# Altium PCB Boost Converter.PcbDoc
Units mil, origin at the board's own origin, x right, y up, seen from the top; angles counter-clockwise.
Board outline 3149.61 x 3625 mil, 2 copper layers (Top Layer, Bottom Layer); 28 components, 20 nets, 64 pads, 15 vias.
Unrouted connection lines stored in the file: 2.
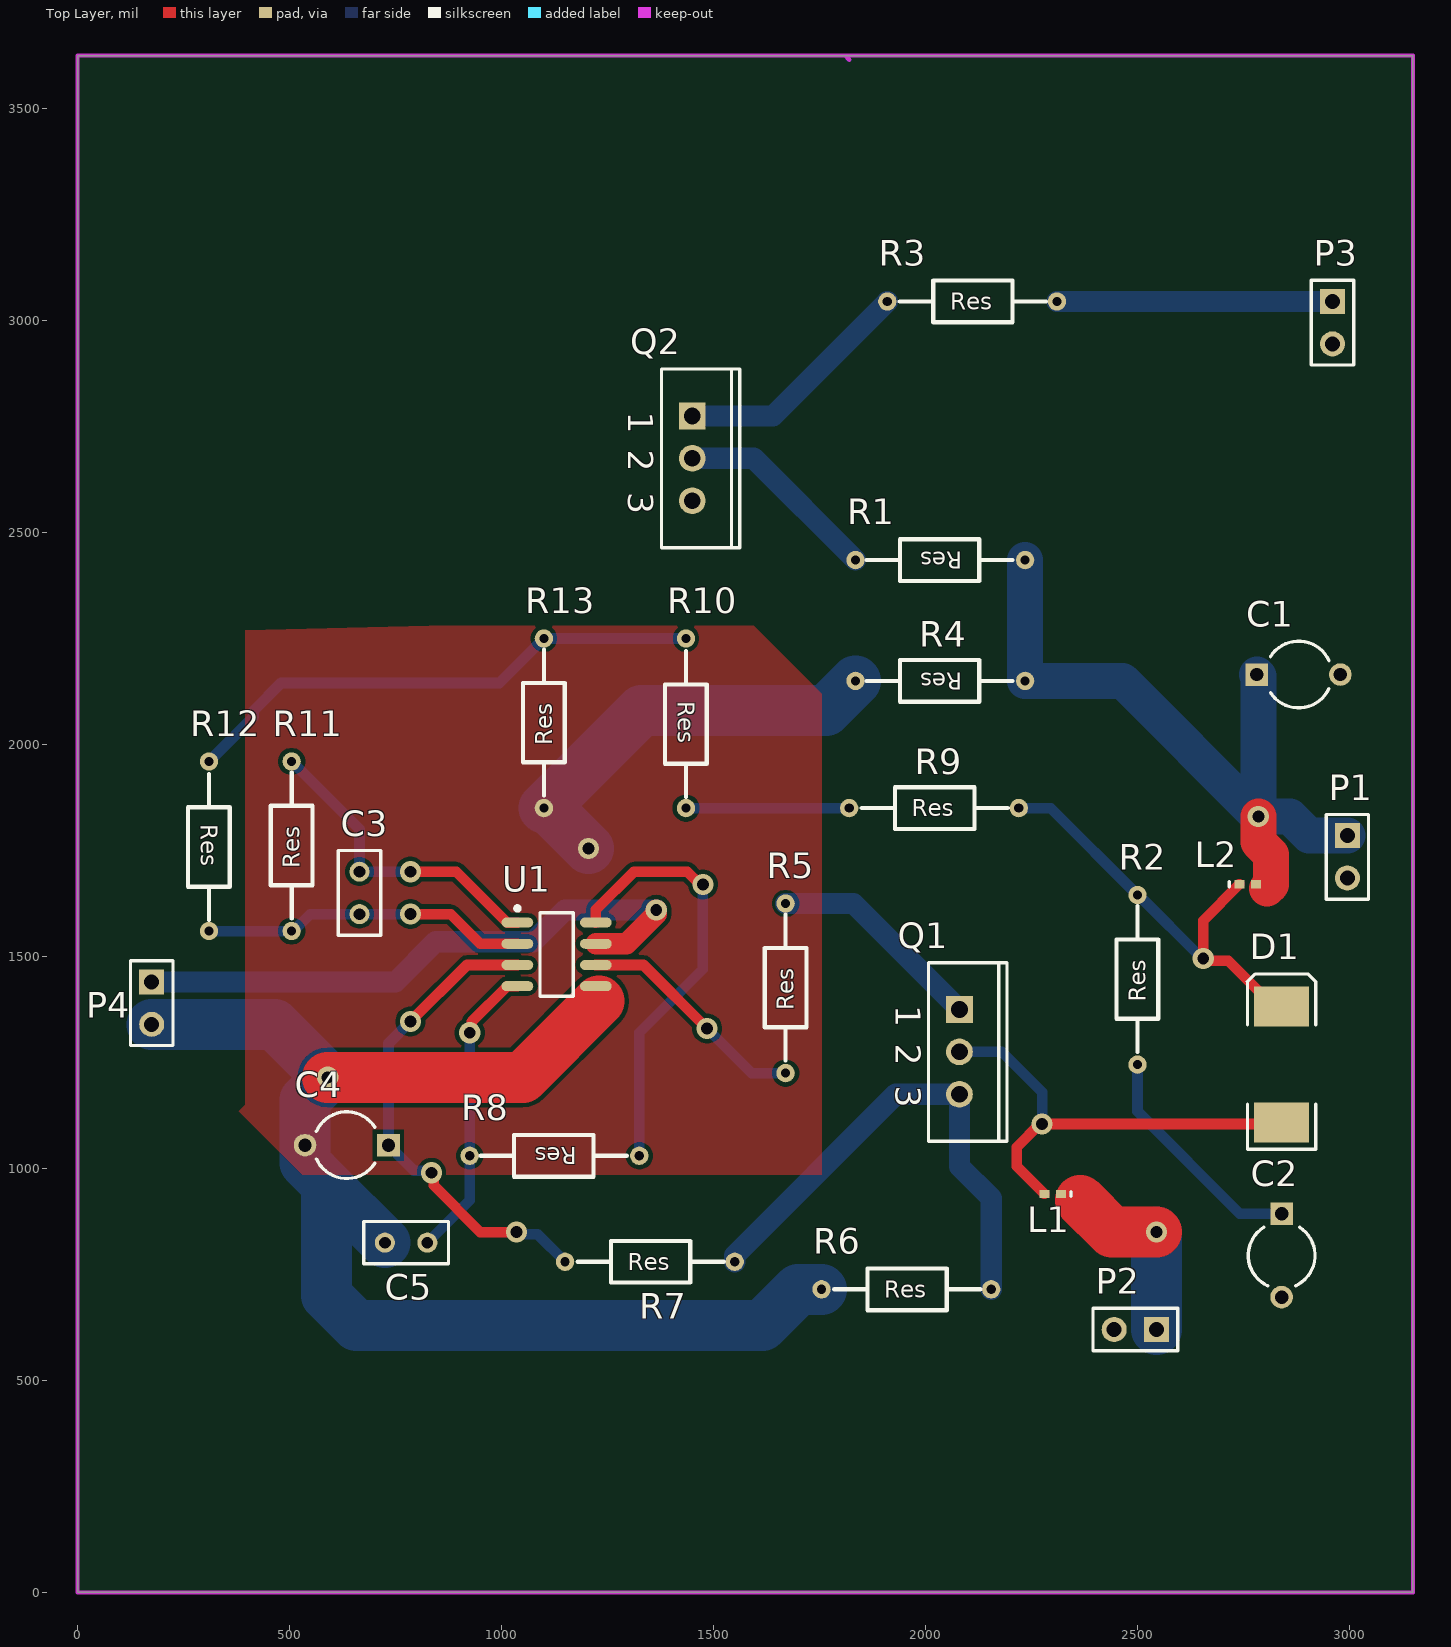
[diagram p0: Top Layer view]
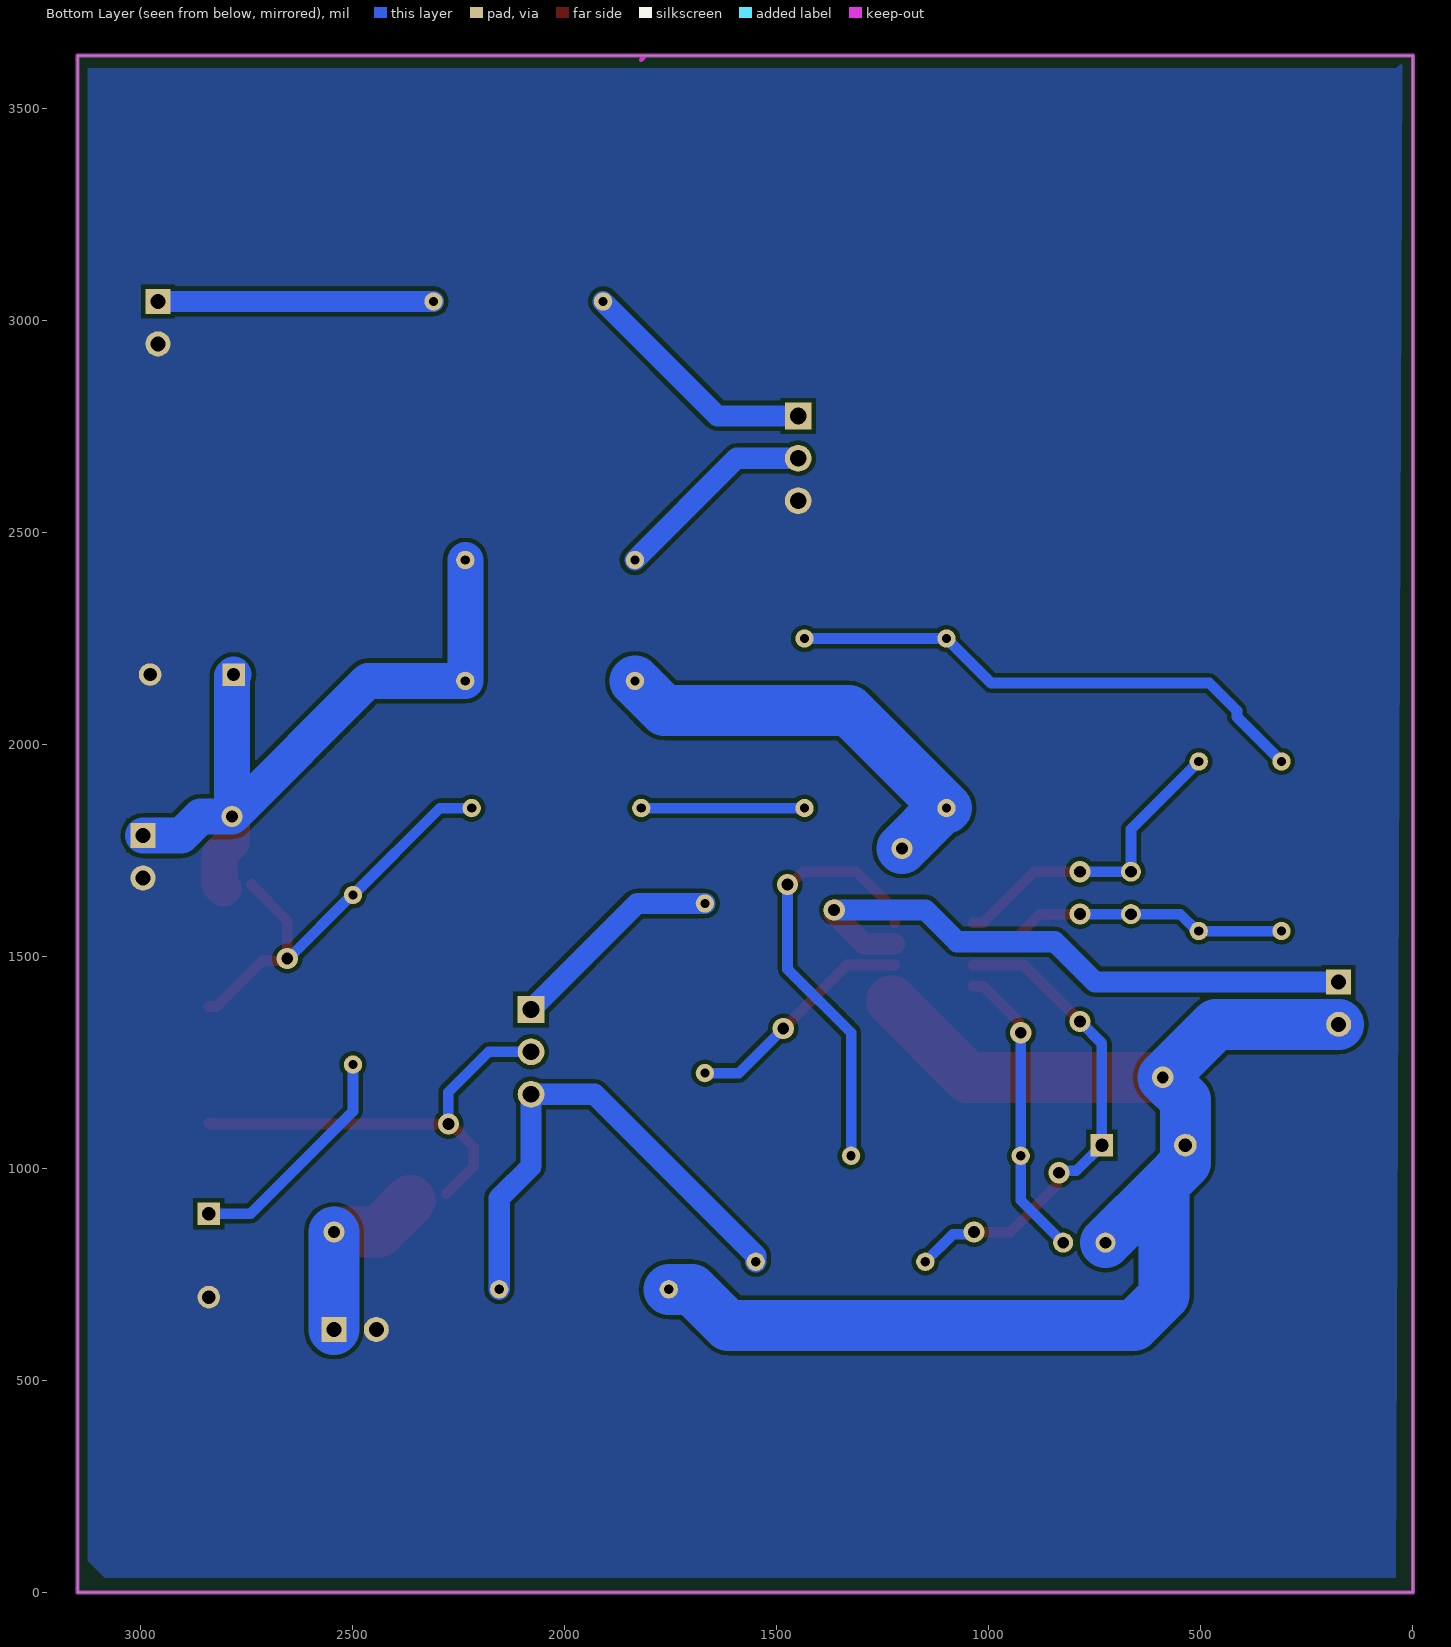
[diagram p1: Bottom Layer view, seen from below]

## Layer stack, top to bottom
Top Solder: solder mask 0.4, Solder Resist, Dk 3.5
Top Layer: signal copper 0.689
Dielectric 1: dielectric 12.6, FR-4, Dk 4.8
Bottom Layer: signal copper 0.689
Bottom Solder: solder mask 0.4, Solder Resist, Dk 3.5

## Board outline
0,0 0,3625 3149.61,3625 3149.61,0

## Design rules (kind name [scope] priority, off if disabled: settings)
Clearance [All] p1: gap=10 ignorepadtopadclearanceinfootprint=FALSE
ComponentClearance [All] p1: gap=16 collisioncheckmode=3 verticalgap=0 showdistances=FALSE
ComponentOrientations [All] p1: allowedrotations=32
HoleSize [All] p1: absolutevalues=TRUE maxlimit=100 minlimit=16 maxpercent=80.000 minpercent=20.000
HoleToHoleClearance [All] p1: gap=16 allowstackedmicrovias=TRUE
Length LVOUT [InNet('V_OUT')] p1: maxlimit=3000 minlimit=0
Length LVIN3 [InNet('VIN3')] p2: maxlimit=2000 minlimit=0
Length LVIN2 [InNet('VIN2')] p3: maxlimit=2000 minlimit=0
Length LVIN1 [InNet('VIN1')] p4: maxlimit=2000 minlimit=0
Length LGND [InNet('GND')] p5: maxlimit=8000 minlimit=0
Length LALL [All] p6: maxlimit=3000 minlimit=0
MinimumAnnularRing [All] p1: minimumring=10
ParallelSegment [All] p1: limit=10000 gap=10
PolygonConnect [All] p1: connectstyle=Direct reliefconductorwidth=10 reliefentries=4 polygonreliefangle="90 Angle" airgapwidth=10
RoutingVias [All] p1: holewidth=40 width=50 viastyle="Through Hole" minholewidth=16 minwidth=32 maxholewidth=125 maxwidth=250
SilkToSilkClearance [All] p1: silktosilkclearance=0
SilkToSolderMaskClearance [IsPad] p1: minsilkscreentomaskgap=0 clearancetoexposedcopper=TRUE
SolderMaskExpansion [All] p1: expansion=8 istentingtop=FALSE
Width WQ2_2 [InNet('NetQ2_2')] p1: maxlimit=1000 minlimit=24.25 preferedwidth=50
Width WQ2_1 [InNet('NetQ2_1')] p2: maxlimit=1000 minlimit=24.25 preferedwidth=50
Width WQ1_2 [InNet('NetQ1_3')] p3: maxlimit=1000 minlimit=24.25 preferedwidth=50
Width WQ1_1 [InNet('NetQ1_1')] p4: maxlimit=1000 minlimit=24.25 preferedwidth=50
Width WVOUT [InNet('V_OUT')] p5: maxlimit=1000 minlimit=63.09 preferedwidth=85
Width WVIN3 [InNet('VIN3')] p6: maxlimit=1000 minlimit=24.25 preferedwidth=50
Width WVIN2 [InNet('VIN2')] p7: maxlimit=1000 minlimit=24.25 preferedwidth=50
Width WVIN1 [InNet('VIN1')] p8: maxlimit=1000 minlimit=110.38 preferedwidth=120
Width WGND [InNet('GND')] p9: maxlimit=1000 minlimit=110.38 preferedwidth=120
Width WGeneral [All] p10: maxlimit=1000 minlimit=14 preferedwidth=25
25 further rules are at their usual default settings.

## Components (designator, comment, footprint, x,y, rotation, side; value= is the part's Value field where it differs from the comment)
C1 "Cap Elec (L1-3)" CAPR5-4X5 2880,2165 r0 top
C2 "Cap Elec (L1-3)" CAPR5-4X5 2840,795 r270 top
C3 "Cap" RAD-0.1 665,1650 r270 top value=3n
C4 "Cap Elec (L1-3)" CAPR5-4X5 635,1055 r180 top
C5 "Cap" RAD-0.1 775,825 r180 top value=2n
D1 "BYW80-200" SMC 2840,1245 r90 top
L1 "Lossy Inductor" 0402-A 2300,940 r180 top value=200u
L2 "Lossy Inductor" 0402-A 2760,1670 r0 top value=5u
P1 "Header 2" HDR1X2 2995,1785 r270 top
P2 "Header 2" HDR1X2 2545,620 r180 top
P3 "Header 2" HDR1X2 2960,3045 r270 top
P4 "Header 2" HDR1X2 175,1440 r270 top
Q1 "IRF530" TO-220AB 2080,1275 r270 top
Q2 "IRF530" TO-220AB 1450,2675 r270 top
R1 "Res1" PCBComponent_1 2235,2435 r180 top value=10
R2 "Res1" PCBComponent_1 2500,1245 r90 top value=100m
R3 "Res1" PCBComponent_1 1910,3045 r0 top value=1k
R4 "Res1" PCBComponent_1 2235,2150 r180 top value=24
R5 "Res1" PCBComponent_1 1670,1225 r90 top value=50
R6 "Res1" PCBComponent_1 1755,715 r0 top value=75m
R7 "Res1" PCBComponent_1 1150,780 r0 top value=1k
R8 "Res1" PCBComponent_1 1325,1030 r180 top value=18k
R9 "Res1" PCBComponent_1 1820,1850 r0 top value=7.5k
R10 "Res1" PCBComponent_1 1435,2250 r270 top value=2.75k
R11 "Res1" PCBComponent_1 505,1560 r90 top value=400k
R12 "Res1" PCBComponent_1 310,1960 r270 top value=5k
R13 "Res1" PCBComponent_1 1100,1850 r90 top value=560
U1 "UC3842" SO8_L 1130,1505 r0 top

## Footprints (in the part's own frame and the unit in brackets; to place one, negate y for a bottom-side part, rotate by r counter-clockwise, add the part's x,y. Pads: shape width x height; smd on the part's side, far side on the other; paste and mask are expansions set on the pad)
0402-A [mm] "Chip Inductor; Body 1 x 0.5 mm (LxW typ)"
  rect 0.6x0.5 smd: 1(-0.5,0) 2(0.5,0)
  silkscreen extent -1.1,-0.15 -1.1,0.15
CAPR5-4X5 [mm] "Capacitor; 2 Leads"
  rect 1.35x1.35 hole 0.8: 1(-2.5,0)
  round 1.35 hole 0.8: 2(2.5,0)
  silkscreen extent -1.69,-2 1.82,2
HDR1X2 [mm] "Connector; Header; 2 Position"
  rect 1.5x1.5 hole 0.9: 1(0,0)
  round 1.5 hole 0.9: 2(2.54,0)
  silkscreen extent -1.27,-1.27 3.81,1.27
PCBComponent_1 [mm]
  round 1.1 hole 0.55: 1(0,0) 2(10.16,0)
  silkscreen extent 0.75,-1.25 9.5,1.25, body extent -0.4,-1.2 10.4,1.2, height 4
RAD-0.1 [mm] "Radial Cap, Thru-Hole; 2 Leads; 0.1 in Pin Spacing"
  round 1.2 hole 0.7: 1(-1.27,0) 2(1.27,0)
  silkscreen extent -2.54,-1.27 2.54,1.27
SMC [mm] "DO-214-AB/SMC; 2 C-Bend Leads; Body 7.9 x 5.9 mm, inc. leads (LxW)"
  rect 2.4x3.3 smd: 1(-3.475,0) 2(3.475,0)
  silkscreen extent -5.07,-2.05 5.43,2.05
SO8_L [mm] "SOIC, 8-Leads, Body 4.9x3.9mm, Pitch 1.27mm, IPC High Density"
  oval 1.9x0.6 smd: 1(-2.35,1.905) 2(-2.35,0.635) 3(-2.35,-0.635) 4(-2.35,-1.905) 5(2.35,-1.905) 6(2.35,-0.635) 7(2.35,0.635) 8(2.35,1.905)
  silkscreen extent -2.47,-2.5 1,2.88, body extent -1.95,-2.45 1.95,2.45, height 1.75
TO-220AB [mm] "TO, Thru-Hole, Vertical, Heatsink Mounted; 3 In-Line Leads; Pitch 2.54 mm"
  rect 1.6x1.6 hole 1: 1(-2.54,0)
  round 1.6 hole 1: 2(0,0) 3(2.54,0)
  silkscreen extent -5.35,-1.85 5.35,2.85

## Part data
C1 C2 C4: "Electrolytic Capacitor (Levels 1-3)", LEVEL=2, PackageReference=CAPR5-4X5, Published=23-Sep-2002, Publisher="Altium Limited"
  C1: CC=200u, RESR=20m, RSH_CC=100Meg
  C2: CC=470u, RESR=30m, RSH_CC=100Meg
  C4: CC=1n, RESR=50, RSH_CC=1G
C3 C5: "Capacitor", Initial Voltage=0, LatestRevisionDate=17-Jul-2002, LatestRevisionNote="Re-released for DXP Platform.", PackageReference=RAD-0.3, Published=8-Jun-2000, Publisher="Altium Limited"
D1: "High-Efficiency Fast Recovery Rectifier Diode", PackageDocument=Sep-1996, Code_JEDEC=DO-214-AB, LatestRevisionDate=17-Jul-2002, LatestRevisionNote="Re-released for DXP Platform.", PackageReference=SMC, Published=8-Jun-2000, Publisher="Altium Limited"
L1 L2: library part "Inductor (Lossy)", Code_IEC=1005, Code_JEITA=0402, LatestRevisionDate=17-Jul-2002, LatestRevisionNote="Re-released for DXP Platform.", PackageReference=0402-A, Published=8-Jun-2000, Publisher="Altium Limited", RSERIES=10m, RSHUNT=1G
P1 P2 P3 P4: "Header, 2-Pin", LatestRevisionDate=17-Jul-2002, LatestRevisionNote="Re-released for DXP Platform.", Publisher="Altium Limited"
Q1 Q2: "HEXFET N-Channel Power MOSFET", ComponentLink1Description="Manufacturer Link", ComponentLink1URL=http://www.irf.com/, ComponentLink2Description=Datasheet, ComponentLink2URL=http://www.irf.com/product-info/datasheets/data/irf530.pdf, DatasheetVersion=PD-9.307O, LatestRevisionDate=17-Jul-2002, LatestRevisionNote="Re-released for DXP Platform.", Note="Pin 2 is electrically connected to pin 4.", PackageDescription="TO, Thru-Hole, Vertical, Heatsink Mounted; 3 In-Line Leads; Pitch 2.54 mm", PackageReference=TO-220AB, PackageVersion=Feb-1997, Published=8-Jun-2000, Publisher="Altium Limited"
R1 R2 R3 R4 R5 R6 R7 R8 R9 R10 R11 R12 R13: "Resistor", LatestRevisionDate=17-Jul-2002, LatestRevisionNote="Re-released for DXP Platform.", PackageReference=AXIAL-0.3, Published=8-Jun-2000, Publisher="Altium Limited"
U1: "High-Performance Current Mode PWM Controller", Code_IPC=SOIC127P600-8, Code_JEDEC=MS-012-AA, ComponentLink1Description="Manufacturer Link", ComponentLink1URL=http://www.st.com/, ComponentLink2Description=Datasheet, ComponentLink2URL=http://www.st.com/stonline/products/literature/ds/4299/uc3842b.pdf, DatasheetVersion=Mar-1999, LatestRevisionDate=13-Apr-2006, LatestRevisionNote="IPC-7351 Footprint Added.", PackageDescription="8-Pin Small Outline Integrated Circuit 1.27 mm Pitch", PackageReference=SO8, PackageVersion=Dec-2002, Published=24-Aug-2001, Publisher="Altium Limited"

## Via types
v1: diameter 50, hole 28, Top Layer to Bottom Layer, 15 vias

## Nets (pads, with @x,y where several pads share a name; then routed paths per layer and width w, separated by ;. In a path a pad name is that pad's centre, name@x,y a point inside that pad or via, vN(x,y) a via of type N, cw(c..) or ccw(c..) an arc to the next point about the centre after c; other vN are vias at no path point)
GND: C1.2 C2.2 C4.2 C5.2 P1.2 P2.2 P3.2 P4.2 Q2.3 R4.2 R6.1 R13.1 U1.5 | length 4169.2
  Top Layer w120: v1(590,1215) 1050,1215 1230,1395
  Bottom Layer w120: P4.2 465,1340 v1(590,1215) 536.57,1161.57 C4.2 536.57,1013.43 587.5,962.5 ; C5.2 587.5,962.5 ; v1(1205,1755) 1110,1850 R13.1 1330,2080 1765,2080 R4.2 ; R6.1 1700,715 1615,630 657.79,630 587.5,700.29 587.5,962.5
NetC2_1: C2.1 R2.1 | length 550.1
  Bottom Layer w25: R2.1 2500,1135 2741.57,893.43 C2.1
NetC3_1: C3.1 R11.2 U1.1 | length 748.5
  Top Layer w25: v1(785,1700) 893.27,1700 1013.27,1580 U1.1
  Bottom Layer w25: R11.2 665,1800 C3.1 v1(785,1700)
NetC3_2: C3.2 R11.1 R12.2 U1.2 | length 773
  Top Layer w25: v1(785,1600) 880,1600 950,1530 U1.2
  Bottom Layer w25: R12.2 R11.1 508.66,1560 548.66,1600 C3.2 v1(785,1600)
NetC4_1: C4.1 R7.1 U1.3 | length 1165.8
  Top Layer w25: v1(785,1346.52) 918.48,1480 U1.3 ; v1(835,990) 839.78,985.22 839.78,960.22 950,850 v1(1035,850)
  Bottom Layer w25: v1(785,1346.52) 733.43,1294.94 C4.1 793.64,994.78 830.22,994.78 v1(835,990) ; v1(1035,850) 1039.78,845.22 1084.78,845.22 R7.1
NetC5_1: C5.1 R8.2 U1.4 | length 707.2
  Top Layer w25: v1(925,1320) 929.78,1324.78 929.78,1346.52 1013.27,1430 U1.4
  Bottom Layer w25: C5.1 925,925 R8.2 v1(925,1320)
NetD1_1: D1.1 L1.2 Q1.2 | length 1095.7
  Top Layer w25: L1.2 2215,1005.31 2215,1050.36 2269.64,1105 v1(2275,1105) 2836.81,1105 D1.1
  Bottom Layer w25: Q1.2 2180,1275 2275,1180 v1(2275,1105)
NetD1_2: D1.2 L2.1 R2.2 R9.2 | length 1024.3
  Top Layer w25: L2.1 2655,1584.68 v1(2655,1495) 2659.78,1490.22 2713.88,1490.22 2822.28,1381.81 D1.2
  Bottom Layer w25: R9.2 2295,1850 R2.2 2502.5,1645 2652.5,1495 v1(2655,1495)
NetQ1_1: Q1.1 R5.2 | length 513.6
  Bottom Layer w50: R5.2 1830,1625 Q1.1
NetQ1_3: Q1.3 R6.2 R7.2 | length 1193.5
  Bottom Layer w50: R7.2 1550,795 1930,1175 Q1.3 2080,1005 2155,930 R6.2
NetQ2_1: Q2.1 R3.1 | length 571.8
  Bottom Layer w50: Q2.1 1640,2775 R3.1
NetQ2_2: Q2.2 R1.2 | length 484.4
  Bottom Layer w50: Q2.2 1595,2675 R1.2
NetR5_1: R5.1 U1.6 | length 553.1
  Top Layer w25: U1.6 1335,1480 v1(1485,1330)
  Bottom Layer w25: v1(1485,1330) 1590,1225 R5.1
NetR8_1: R8.1 U1.8 | length 1034.3
  Top Layer w25: U1.8 1222.52,1610 1312.52,1700 1438.24,1700 1468.24,1670 v1(1475,1670)
  Bottom Layer w25: R8.1 1325,1320 1475,1470 v1(1475,1670)
NetR9_1: R9.1 R10.2 | length 385
  Bottom Layer w25: R10.2 R9.1
NetR10_1: R10.1 R12.1 R13.2 | length 1253.9
  Bottom Layer w25: R12.1 415,2065 415,2080 480,2145 995,2145 R13.2 R10.1
V_OUT: C1.1 L2.2 P1.1 R1.1 R4.1 | length 1719
  Top Layer w85: v1(2785,1830) 2785,1770 2814.79,1740.21 2814.79,1669.79 2805,1660
  Bottom Layer w85: R1.1 R4.1 2465,2150 v1(2785,1830) ; C1.1 2785,2161.57 v1(2785,1830) ; P1.1 2905,1785 2860,1830 v1(2785,1830)
VIN1: L1.1 P2.1 | length 441.1
  Top Layer w120: 2365,925 2440,850 v1(2545,850)
  Bottom Layer w120: P2.1 v1(2545,850)
VIN2: P3.1 R3.2 | length 650
  Bottom Layer w50: R3.2 P3.1
VIN3: P4.1 U1.7 | length 1441.9
  Top Layer w50: U1.7 1295,1530 1365,1600 v1(1365,1610)
  Bottom Layer w50: P4.1 750,1440 845,1535 1075,1535 1150,1610 v1(1365,1610)

## Polygon pours and split planes (outlines as drawn)
GND on Bottom Layer "GND_L02_P000" (solid, pour order 0): 25,3610 40,3595 3125,3595 3125,75 3085,35 40,35
GND on Top Layer "GND_L01_P001" (solid, pour order 1): 830,2280 1595,2280 1755,2120 1755,985.22 529.78,985.22 380,1135 395,1150 395,2270

## Keep-outs
Keep-Out Layer:
  lines w10: 0,3622.05 0,0 3149.61,0 3149.61,3625 0,3625 ; 1810,3625 1820,3615

## Text inside footprints (layer, text, board x,y; h text height)
Q1: Top Overlay "2" at 1929.41,1294.68 h59.06 r270; Top Overlay "1" at 1929.41,1384.84 h59.06 r270; Top Overlay "3" at 1929.41,1194.68 h59.06 r270
Q2: Top Overlay "2" at 1299.41,2694.68 h59.06 r270; Top Overlay "1" at 1299.41,2784.84 h59.06 r270; Top Overlay "3" at 1299.41,2594.68 h59.06 r270
R1: Top Overlay "Res" at 2087.2,2454.53 h39.37 r180
R2: Top Overlay "Res" at 2519.53,1392.8 h39.37 r90
R3: Top Overlay "Res" at 2057.8,3025.47 h39.37
R4: Top Overlay "Res" at 2087.2,2169.53 h39.37 r180
R5: Top Overlay "Res" at 1689.53,1372.8 h39.37 r90
R6: Top Overlay "Res" at 1902.8,695.47 h39.37
R7: Top Overlay "Res" at 1297.8,760.47 h39.37
R8: Top Overlay "Res" at 1177.2,1049.53 h39.37 r180
R9: Top Overlay "Res" at 1967.8,1830.47 h39.37
R10: Top Overlay "Res" at 1415.47,2102.2 h39.37 r270
R11: Top Overlay "Res" at 524.53,1707.8 h39.37 r90
R12: Top Overlay "Res" at 290.47,1812.2 h39.37 r270
R13: Top Overlay "Res" at 1119.53,1997.8 h39.37 r90